# Altium PCB 原理图.PcbDoc
Units mm, origin at the board's own origin, x right, y up, seen from the top; angles counter-clockwise.
Board outline 63.37 x 87.63 mm, 2 copper layers (Top Layer, Bottom Layer); 25 components, 45 nets, 166 pads, 48 vias.
Unrouted connection lines stored in the file: 11.
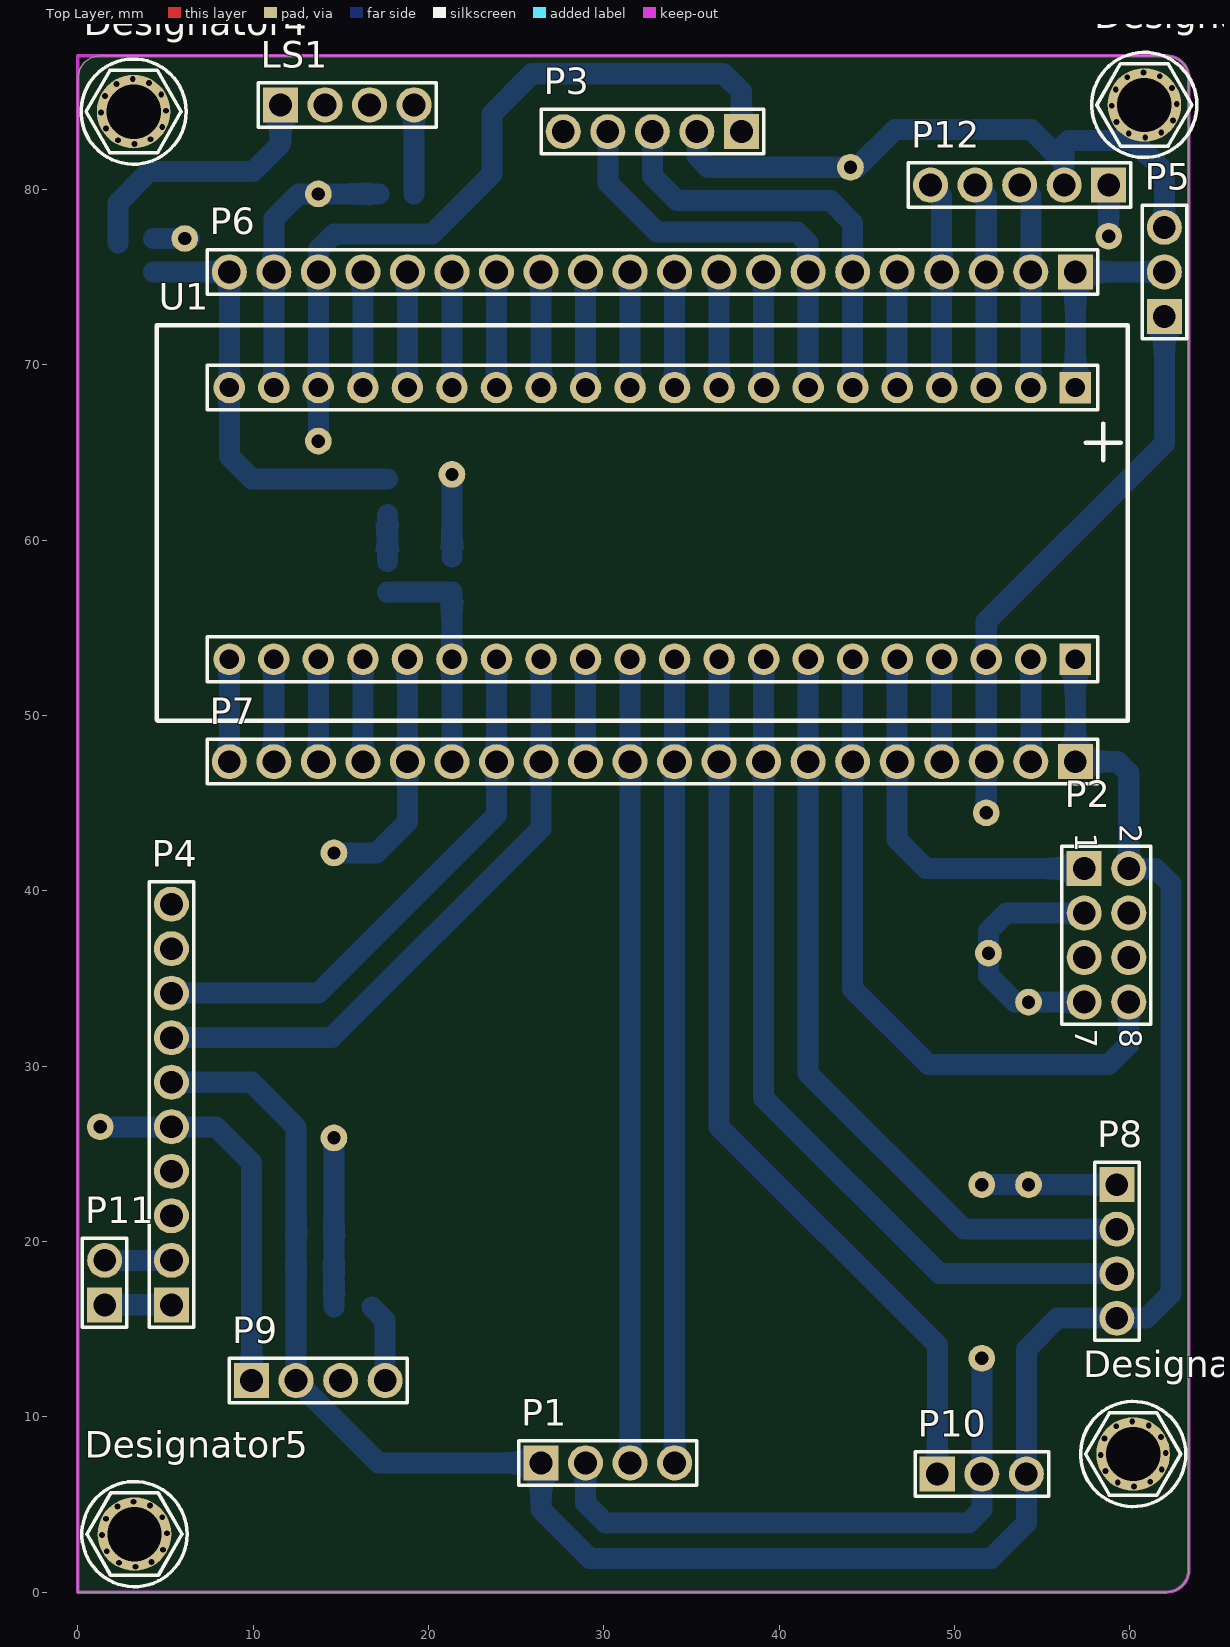
[diagram p0: Top Layer view]
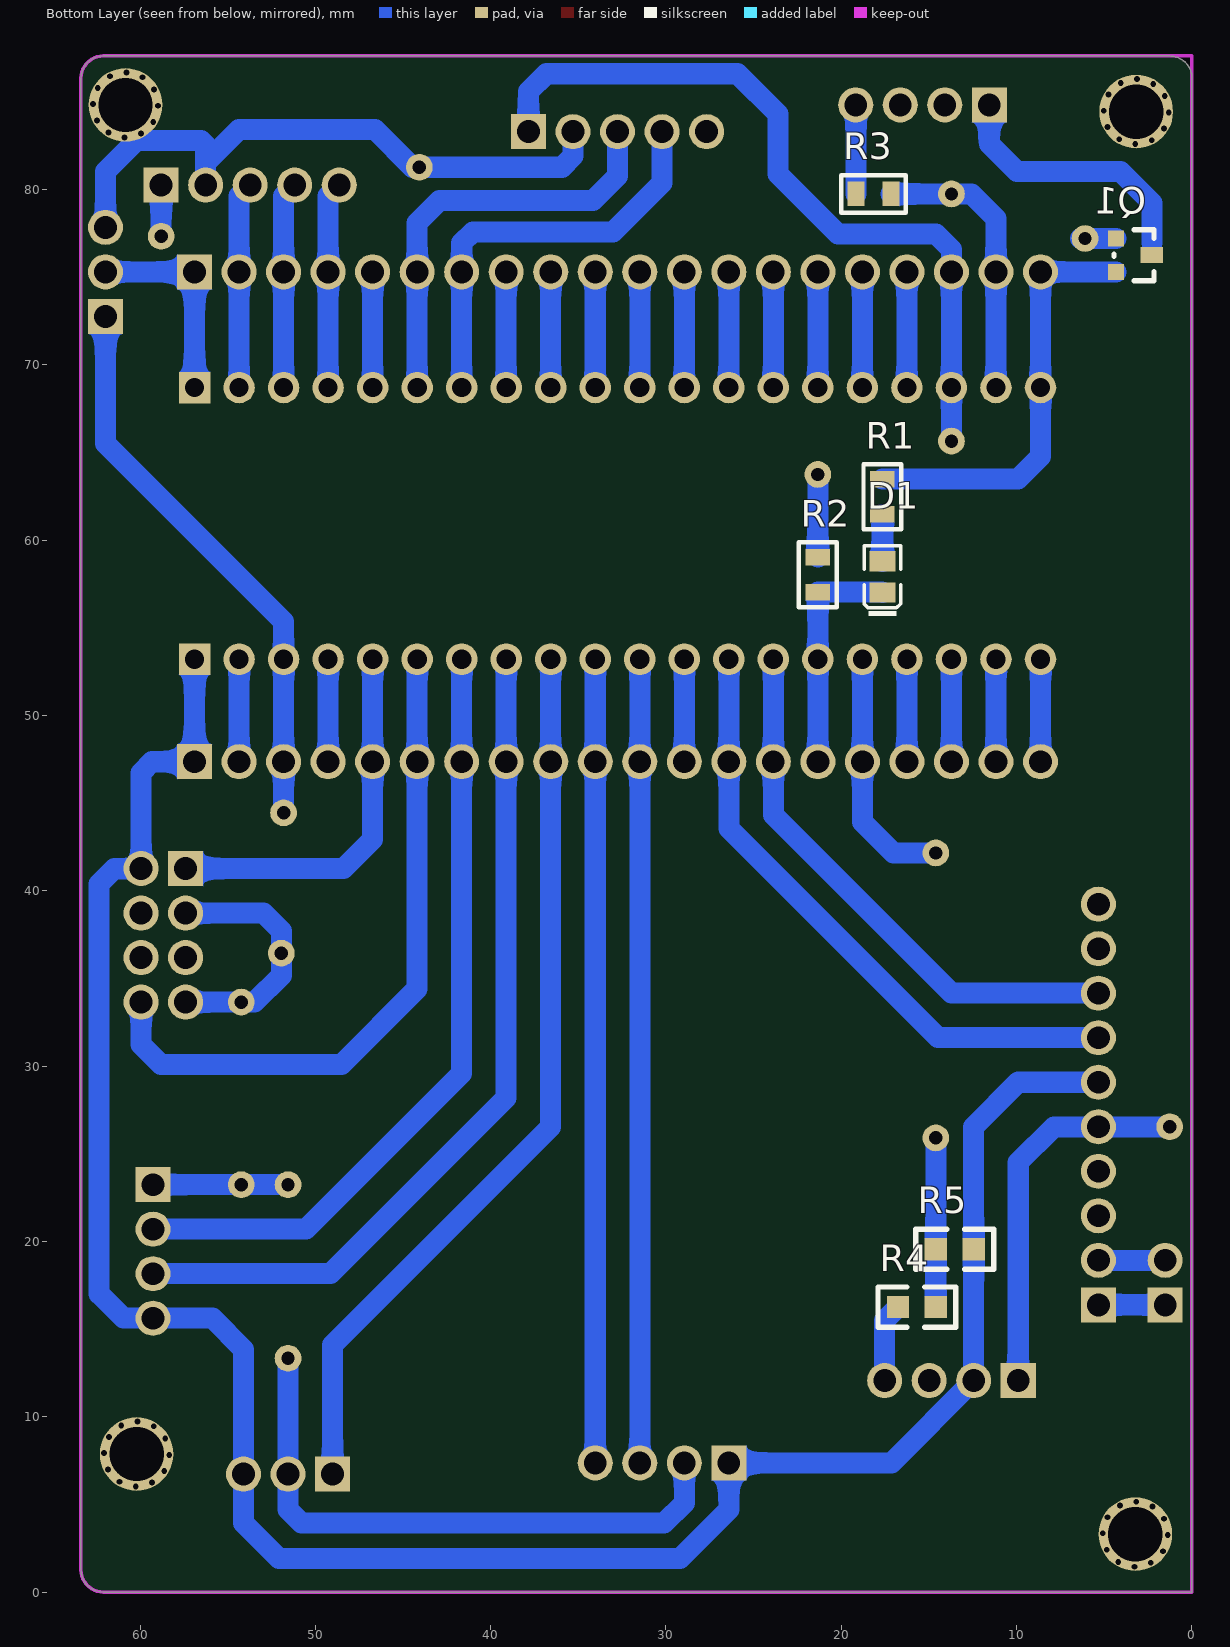
[diagram p1: Bottom Layer view, seen from below]
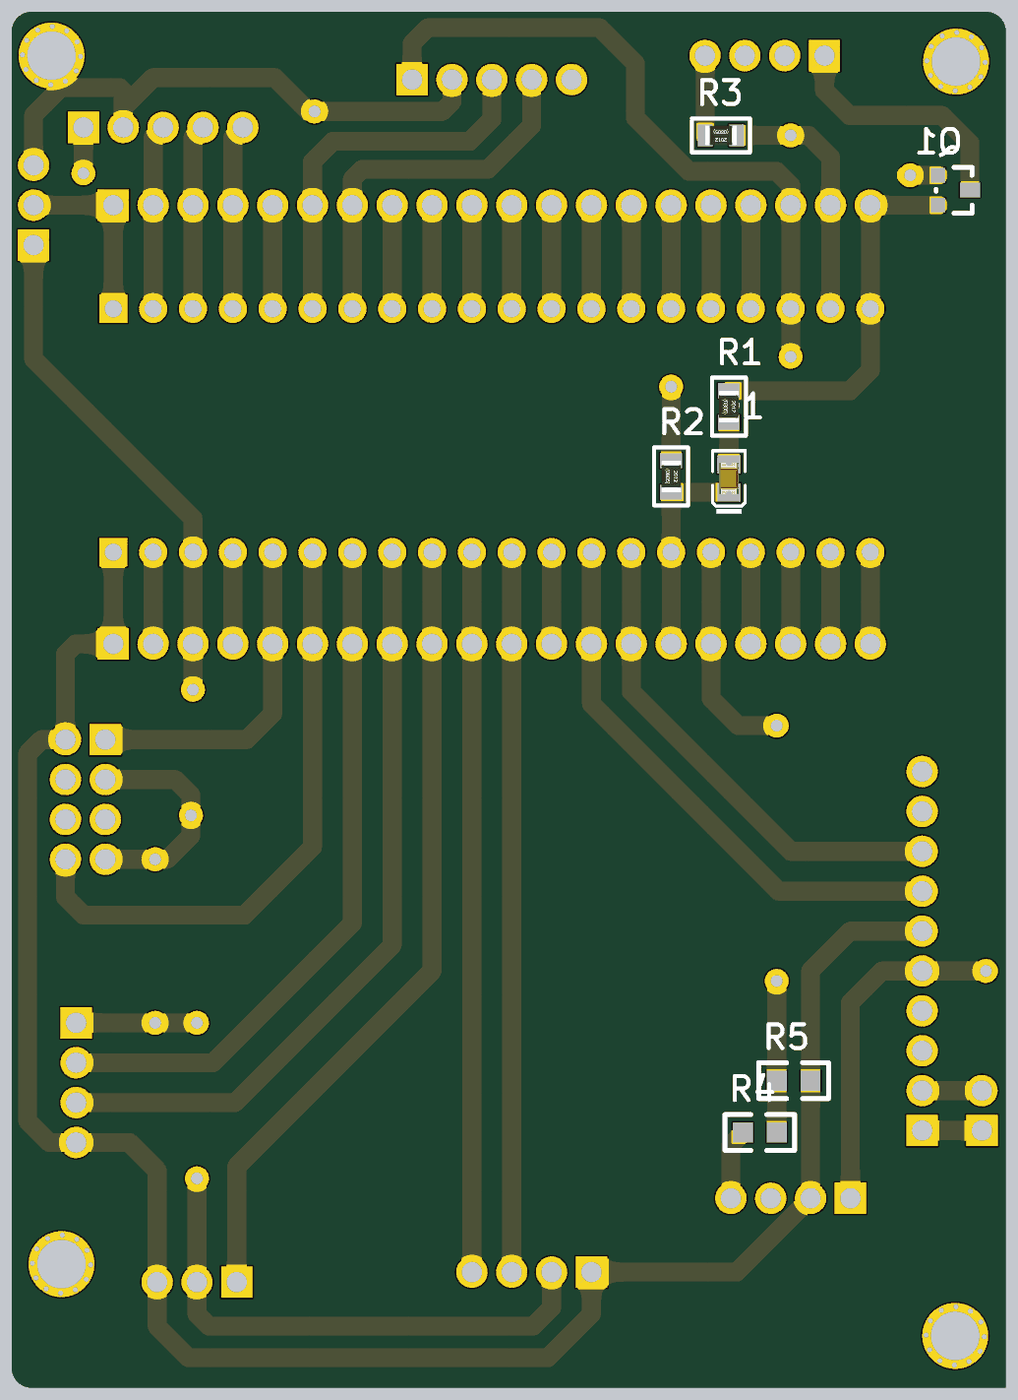
[diagram p2: 3D render of the assembled board from below, using the file's embedded part models]

## Layer stack, top to bottom
Top Solder: solder mask 0.0102, Solder Resist, Dk 3.5
Top Layer: signal copper 0.0356
Dielectric 1: dielectric 0.32, FR-4, Dk 4.8
Bottom Layer: signal copper 0.0356
Bottom Solder: solder mask 0.0102, Solder Resist, Dk 3.5

## Board outline
0,0 62.103,0 ccw(c62.103,1.27) 63.373,1.27 63.373,86.36 ccw(c62.103,86.36) 62.103,87.63 1.27,87.63 ccw(c1.27,86.36) 0,86.36

## Design rules (kind name [scope] priority, off if disabled: settings)
Clearance [All] p1: gap=0.254
PolygonConnect [All] p1: connectstyle=Relief reliefconductorwidth=0.254 reliefentries=4 polygonreliefangle="90 Angle" airgapwidth=0.254
RoutingVias [All] p1: holewidth=0.711 width=1.27 viastyle="Through Hole" minholewidth=0.711 minwidth=1.27 maxholewidth=0.711 maxwidth=1.27
SolderMaskExpansion [All] p1: expansion=0.102
Width [All] p1: maxlimit=1.2 minlimit=1 preferedwidth=1.2
30 further rules are at their usual default settings.

## Classes and differential pairs
component class 原理图: D1 LS1 P1 P2 P3 P4 P5 P6 P7 P8 P9 P10 P11 P12 Q1 R1 R2 R3 R4 R5 U1

## Components (designator, comment, footprint, x,y, rotation, side; value= is the part's Value field where it differs from the comment)
D1 "W" LC-0805_LED_S1 17.653,57.912 r90 bottom
Designator3 "Comment" 定位孔 60.833,84.836 r0 top
Designator4 "Comment" 定位孔 3.175,84.455 r0 top
Designator5 "Comment" 定位孔 3.226,3.302 r0 top
Designator6 "Comment" 定位孔 60.198,7.874 r0 top
LS1 "BEEP" HDR1X4 11.557,84.836 r0 top
P1 "OLED12864" HDR1X4 26.416,7.366 r0 top
P2 "ESP8266" HDR2X4 57.404,41.275 r270 top
P3 "GPS" HDR1X5 37.846,83.312 r180 top
P4 "JQ8400语音" HDR1X10 5.334,16.383 r90 top
P5 "DHT11" HDR1X3 61.976,72.771 r90 top
P6 "Header 20" HDR1X20 56.896,75.311 r180 top
P7 "Header 20" HDR1X20 56.896,47.371 r180 top
P8 "心率传感器" HDR1X4 59.264,23.241 r270 top
P9 "气体传感器" HDR1X4 9.906,12.065 r0 top
P10 "触摸按键" HDR1X3 49.022,6.731 r0 top
P11 "喇叭接口" HDR1X2 1.524,16.383 r90 top
P12 "DS1302" HDR1X5 58.801,80.264 r180 top
Q1 "8550" "SOT-23 MOS" 4.318,75.311 r90 bottom
R1 "Res2" 0805#1 17.653,62.484 r270 bottom
R2 "Res2" 0805#1 21.336,58.039 r270 bottom
R3 "Res2" 0805#1 18.161,79.756 r0 bottom
R4 "Res2" 0805#2 16.637,16.256 r180 bottom
R5 "Res2" 0805#2 12.573,19.558 r0 bottom
U1 "STM32F103C8T6" STM32F103C8T6_HXB 56.896,60.963 r180 top

## Footprints (in the part's own frame and the unit in brackets; to place one, negate y for a bottom-side part, rotate by r counter-clockwise, add the part's x,y. Pads: shape width x height; smd on the part's side, far side on the other; paste and mask are expansions set on the pad)
0805#1 [mm] "SMD, 0805"
  rect 0.95x1.4 smd: 1(-1,0) 2(1,0)
  silkscreen extent -1.85,-1.08 1.85,1.08, body extent -1,-0.62 1,0.63, height 0.45
0805#2 [mm]
  rect 1.27x1.27 smd: 1(-0.127,0) 2(2.032,0)
  silkscreen extent -1.27,-1.14 3.17,1.14
HDR1X2 [mm] "Connector; Header; 2 Position"
  rect 2x2 hole 1.3: 1(0,0)
  round 2 hole 1.3: 2(2.54,0)
  silkscreen extent -1.27,-1.27 3.81,1.27
HDR1X3 [mm] "Connector; Header; 3 Position"
  rect 2x2 hole 1.3: 1(0,0)
  round 2 hole 1.3: 2(2.54,0) 3(5.08,0)
  silkscreen extent -1.27,-1.27 6.35,1.27
HDR1X4 [mm] "Connector; Header; 4 Position"
  rect 2x2 hole 1.3: 1(0,0)
  round 2 hole 1.3: 2(2.54,0) 3(5.08,0) 4(7.62,0)
  silkscreen extent -1.27,-1.27 8.89,1.27
HDR1X5 [mm] "Connector; Header; 5 Position"
  rect 2x2 hole 1.3: 1(0,0)
  round 2 hole 1.3: 2(2.54,0) 3(5.08,0) 4(7.62,0) 5(10.16,0)
  silkscreen extent -1.27,-1.27 11.43,1.27
HDR1X10 [mm] "Connector; Header; 10 Position"
  rect 2x2 hole 1.3: 1(0,0)
  round 2 hole 1.3: 2(2.54,0) 3(5.08,0) 4(7.62,0) 5(10.16,0) 6(12.7,0) 7(15.24,0) 8(17.78,0) 9(20.32,0) 10(22.86,0)
  silkscreen extent -1.27,-1.27 24.13,1.27
HDR1X20 [mm] "Connector; Header; 20 Position"
  rect 2x2 hole 1.3: 1(0,0)
  round 2 hole 1.3: 2(2.54,0) 3(5.08,0) 4(7.62,0) 5(10.16,0) 6(12.7,0) 7(15.24,0) 8(17.78,0) 9(20.32,0) 10(22.86,0) 11(25.4,0) 12(27.94,0) 13(30.48,0) 14(33.02,0) 15(35.56,0) 16(38.1,0) 17(40.64,0) 18(43.18,0) 19(45.72,0) 20(48.26,0)
  silkscreen extent -1.27,-1.27 49.53,1.27
HDR2X4 [mm] "Connector; Header; 4x2 Position"
  rect 2x2 hole 1.3: 1(0,0)
  round 2 hole 1.3: 2(0,2.54) 3(2.54,0) 4(2.54,2.54) 5(5.08,0) 6(5.08,2.54) 7(7.62,0) 8(7.62,2.54)
  silkscreen extent -1.27,-1.27 8.89,3.81
LC-0805_LED_S1 [mm]
  rect 1.16x1.47 smd: A(0.89,0) K(-0.89,0)
  silkscreen extent -2.24,-1.04 1.77,1.03, body extent -1.01,-0.63 1.01,0.62, height 1.1
"SOT-23 MOS" [mil]
  rect 36x36 smd: 1(0,0) 2(75,0)
  rect 36x50 smd: 3(38,-80)
  silkscreen extent -20,-85 95,5
STM32F103C8T6_HXB [mm]
  rect 1.8x1.8 hole 1.1: 1(0,-7.75) 40(0,7.75)
  round 1.8 hole 1.1: 2(2.54,-7.75) 3(5.08,-7.75) 4(7.62,-7.75) 5(10.16,-7.75) 6(12.7,-7.75) 7(15.24,-7.75) 8(17.78,-7.75) 9(20.32,-7.75) 10(22.86,-7.75) 11(25.4,-7.75) 12(27.94,-7.75) 13(30.48,-7.75) 14(33.02,-7.75) 15(35.56,-7.75) 16(38.1,-7.75) 17(40.64,-7.75) 18(43.18,-7.75) 19(45.72,-7.75) 20(48.26,-7.75) 21(48.26,7.75) 22(45.72,7.75) 23(43.18,7.75) 24(40.64,7.75) 25(38.1,7.75) 26(35.56,7.75) 27(33.02,7.75) 28(30.48,7.75) 29(27.94,7.75) 30(25.4,7.75) 31(22.86,7.75) 32(20.32,7.75) 33(17.78,7.75) 34(15.24,7.75) 35(12.7,7.75) 36(10.16,7.75) 37(7.62,7.75) 38(5.08,7.75) 39(2.54,7.75)
  silkscreen extent -3,-11.3 52.4,11.25
定位孔 [mm]
  round 4.2 hole 3.1: 1(0,0)
  silkscreen extent -3,-3 3,3

## Part data
D1: library part LED
LS1: library part Bell, "Electrical Bell"
P1 P8 P9: library part "Header 4", "Header, 4-Pin"
P2: library part "Header 4X2", "Header, 4-Pin, Dual row"
P3 P12: library part "Header 5", "Header, 5-Pin"
P4: library part "Header 10", "Header, 10-Pin"
P5 P10: library part "Header 3", "Header, 3-Pin"
P6 P7: "Header, 20-Pin"
P11: library part "Header 2", "Header, 2-Pin"
Q1: library part 2N3906, "PNP General Purpose Amplifier"
R1 R2 R3 R4 R5: "Resistor"
U1: library part Component_1

## Free pads (board coordinates)
  round 1.524 hole 0.762: 0(14.605,25.908) 1(14.605,42.164) 11(6.096,77.216) 12(21.336,63.754) 13(13.716,79.756) 16(51.816,44.45) 17(51.943,36.449) 18(1.27,26.543) 19(13.716,65.659) 21(54.229,33.655) 22(54.229,23.241) 23(51.562,23.241) 24(51.562,13.335) 25(44.069,81.28) 26(58.801,77.343)

## Via types
v1: diameter 0.406, hole 0.33, Top Layer to Bottom Layer, 48 vias

## Nets (pads, with @x,y where several pads share a name; then routed paths per layer and width w, separated by ;. In a path a pad name is that pad's centre, name@x,y a point inside that pad or via, vN(x,y) a via of type N, cw(c..) or ccw(c..) an arc to the next point about the centre after c; other vN are vias at no path point)
BEEP: D1.K P7.15 R2.2 U1.26 | length 13.4
  Bottom Layer w1.2: D1.K 17.67,57.039 R2.2 U1.26 P7.15
CLK: P6.2 P12.3 U1.2 | length 11.8
  Bottom Layer w1.2: P12.3 54.356,79.629 P6.2 U1.2
DAT: P6.3 P12.4 U1.3 | length 11.8
  Bottom Layer w1.2: P12.4 51.816,79.629 P6.3 U1.3
DHT11_DATA: P5.2 P6.1 U1.1 | length 11.7
  Bottom Layer w1.2: U1.1 P6.1 P5.2
GND: Designator3.1 P1.1 P2.2 P3.2 P4.6 P5.3 P6.19 P7.1 P7.2 P8.4 P9.2 P10.3 P12.2 pad.13 pad.25 R3.1 R5.1 U1.19 U1.39 U1.40 | length 189.5
  Bottom Layer w1.2: P4.6 9.906,29.083 12.446,26.543 R5.1 P9.2 17.145,7.366 P1.1 26.416,4.699 29.21,1.905 52.076,1.905 54.102,3.931 P10.3 54.102,13.843 55.88,15.621 P8.4 60.96,15.621 62.357,17.018 62.357,40.386 61.468,41.275 P2.2 59.944,46.736 59.309,47.371 P7.1 U1.40 ; U1.19 P6.19 11.176,78.359 12.573,79.756 pad.13 R3.1 ; P3.2 35.306,81.915 35.941,81.28 pad.25 44.45,81.28 46.609,83.439 54.356,83.439 56.261,81.534 ; P7.2 U1.39 ; P12.2 56.261,81.534 ; P5.3 61.976,81.026 60.198,82.804 56.515,82.804 56.261,82.55 56.261,81.534
NetD1_A: D1.A R1.2 | length 2.7
  Bottom Layer w1.2: D1.A R1.2
NetLS1_1: LS1.1 Q1.3 | length 15.2
  Bottom Layer w1.2: 2.286,76.962 2.286,79.248 4.064,81.026 9.982,81.026 11.557,82.601 LS1.1
NetLS1_2: LS1.2 R3.2 | length 5.1
  Bottom Layer w1.2: R3.2 19.161,84.82 19.177,84.836
NetP6_5: P6.5 U1.5 | length 6.6
  Bottom Layer w1.2: U1.5 P6.5
NetP6_8: P6.8 U1.8 | length 6.6
  Bottom Layer w1.2: U1.8 P6.8
NetP6_9: P6.9 U1.9 | length 6.6
  Bottom Layer w1.2: U1.9 P6.9
NetP6_10: P6.10 U1.10 | length 6.6
  Bottom Layer w1.2: U1.10 P6.10
NetP6_11: P6.11 U1.11 | length 6.6
  Bottom Layer w1.2: U1.11 P6.11
NetP6_12: P6.12 U1.12 | length 6.6
  Bottom Layer w1.2: U1.12 P6.12
NetP6_13: P6.13 U1.13 | length 6.6
  Bottom Layer w1.2: U1.13 P6.13
NetP6_14: P6.14 U1.14 | length 6.6
  Bottom Layer w1.2: U1.14 P6.14
NetP6_15: P6.15 U1.15 | length 6.6
  Bottom Layer w1.2: U1.15 P6.15
NetP6_16: P6.16 U1.16 | length 6.6
  Bottom Layer w1.2: U1.16 P6.16
NetP6_17: P6.17 U1.17 | length 6.6
  Bottom Layer w1.2: U1.17 P6.17
NetP7_4: P7.4 U1.37 | length 5.8
  Bottom Layer w1.2: P7.4 U1.37
NetP7_12: P7.12 U1.29 | length 5.8
  Bottom Layer w1.2: P7.12 U1.29
NetP7_17: P7.17 U1.24 | length 5.8
  Bottom Layer w1.2: P7.17 U1.24
NetP7_18: P7.18 U1.23 | length 5.8
  Bottom Layer w1.2: P7.18 U1.23
NetP7_19: P7.19 U1.22 | length 5.8
  Bottom Layer w1.2: P7.19 U1.22
NetP7_20: P7.20 U1.21 | length 5.8
  Bottom Layer w1.2: P7.20 U1.21
NetP9_4: P9.4 R4.1 | length 4.5
  Bottom Layer w1.2: R4.1 17.526,15.494 P9.4
NetQ1_2: pad.11 pad.12 Q1.2 R2.1 | length 6.7
  Bottom Layer w1.2: Q1.2 pad.11@6.35,77.216 ; R2.1 pad.12
NetR4_2: pad.0 R4.2 R5.2 | length 9.7
  Bottom Layer w1.2: R4.2 R5.2 pad.0
QT_AO: P7.16 pad.1 U1.25 | length 14.2
  Bottom Layer w1.2: pad.1 17.035,42.164 18.796,43.925 P7.16 U1.25
RST: P6.4 P12.5 U1.4 | length 11.8
  Bottom Layer w1.2: P12.5 49.276,79.629 P6.4 U1.4
SCL: P1.3 P7.11 U1.30 | length 46
  Bottom Layer w1.2: P1.3@31.369,7.239 P1.3 P7.11 U1.30
SCL_XL: P7.8 P8.3 U1.33 | length 49.3
  Bottom Layer w1.2: U1.33 P7.8 39.116,28.194 49.149,18.161 P8.3
SDA: P1.4 P7.10 U1.31 | length 45.8
  Bottom Layer w1.2: P1.4 P7.10 U1.31
SDA_XL: P7.7 P8.2 U1.34 | length 44.9
  Bottom Layer w1.2: U1.34 P7.7 41.656,29.591 50.546,20.701 P8.2
SIG: P7.9 P10.1 U1.32 | length 51.6
  Bottom Layer w1.2: U1.32 P7.9 36.576,26.543 49.022,14.097 P10.1
SPK+: P4.1 P11.1 | length 3.8
  Bottom Layer w1.2: P11.1 P4.1
SPK-: P4.2 P11.2 | length 3.8
  Bottom Layer w1.2: P11.2 P4.2
URXD: P2.8 P7.6 U1.35 | length 39.2
  Bottom Layer w1.2: U1.35 P7.6 44.196,34.417 48.514,30.099 58.801,30.099 59.944,31.242 P2.8
USART1_RX: P3.4 P6.7 U1.7 | length 24
  Bottom Layer w1.2: P3.4 30.226,80.391 33.02,77.597 41.021,77.597 41.656,76.962 P6.7 U1.7
USART1_TX: P3.3 P6.6 U1.6 | length 24.5
  Bottom Layer w1.2: P3.3 32.766,80.772 34.163,79.375 42.926,79.375 44.196,78.105 P6.6 U1.6
USART2_RX: P4.7 P7.13 U1.28 | length 35.7
  Bottom Layer w1.2: P4.7 14.478,31.623 26.416,43.561 P7.13 U1.28
USART2_TX: P4.8 P7.14 U1.27 | length 31.6
  Bottom Layer w1.2: P4.8 13.716,34.163 23.876,44.323 P7.14 U1.27
UTXD: P2.1 P7.5 U1.36 | length 21.6
  Bottom Layer w1.2: U1.36 P7.5 46.736,42.926 48.387,41.275 P2.1
VCC: P1.2 P2.3 P2.7 P5.1 P6.20 P7.3 P8.1 P10.2 P12.1 pad.16 pad.17 pad.21 pad.22 pad.23 pad.24 pad.26 Q1.1 R1.1 U1.20 U1.38 | length 116.1
  Bottom Layer w1.2: Q1.1 P6.20 U1.20 8.636,64.77 9.922,63.484 R1.1 ; P1.2 28.956,5.08 30.105,3.931 50.794,3.931 51.562,4.699 P10.2 pad.24 ; pad.23 pad.22 P8.1 ; pad.16 P7.3 U1.38 51.816,55.372 61.976,65.532 P5.1 ; P2.7 53.467,33.655 51.943,35.179 pad.17 51.943,37.719 52.959,38.735 P2.3 ; pad.26@58.801,77.597 P12.1
VCC_5V: P3.1 P4.5 P6.18 P9.1 pad.18 pad.19 U1.18 | length 65.8
  Bottom Layer w1.2: pad.18 P4.5 7.874,26.543 9.906,24.511 P9.1 ; pad.19 U1.18 P6.18 13.716,76.581 14.605,77.47 20.193,77.47 23.622,80.899 23.622,84.328 25.908,86.614 36.83,86.614 37.846,85.598 P3.1
pads on no net: Designator4.1 Designator5.1 Designator6.1 LS1.3 LS1.4 P2.4 P2.5 P2.6 P3.5 P4.3 P4.4 P4.9 P4.10 P9.3
copper on no net: | length 0.3
  Bottom Layer w1.2: 14.986,12.065 14.986,12.319
  other v1: 3.277,1.448 2.343,1.671 4.197,1.722 1.645,2.331 4.857,2.419 1.372,3.251 5.08,3.353 1.595,4.185 4.806,4.273 2.255,4.882 4.109,4.933 3.175,5.156 60.249,6.02 59.315,6.243 61.169,6.294 58.618,6.903 61.829,6.991 58.344,7.823 62.052,7.925 58.567,8.757 61.778,8.845 59.227,9.454 61.081,9.505 60.147,9.728 3.226,82.601 2.292,82.824 4.146,82.875 60.884,82.982 59.95,83.205 61.804,83.256 1.595,83.484 4.806,83.572 59.253,83.865 62.464,83.953 1.321,84.404 5.029,84.506 58.979,84.785 62.687,84.887 1.544,85.338 4.755,85.426 59.202,85.719 62.413,85.807 2.204,86.035 4.058,86.086 3.124,86.309 59.862,86.416 61.716,86.467 60.782,86.69

## Keep-outs
Keep-Out Layer:
  lines w0.2: 0,0 62.103,0 ccw(c62.103,1.27) 63.373,1.27 63.373,86.36 ccw(c62.103,86.36) 62.103,87.63 1.27,87.63 0,87.63 0,0

## Text inside footprints (layer, text, board x,y; h text height)
P2: Top Overlay "2" at 59.436,43.815 h1.27 r270; Top Overlay "1" at 56.896,43.307 h1.27 r270; Top Overlay "7" at 56.896,32.131 h1.27 r270; Top Overlay "8" at 59.436,32.131 h1.27 r270